# Altium PCB LM3488_PCB1.PcbDoc
Units mm, origin at the board's own origin, x right, y up, seen from the top; angles counter-clockwise.
Board outline 70.99 x 22.48 mm, 2 copper layers (Top Layer, Bottom Layer); 20 components, 12 nets, 53 pads, 98 vias.
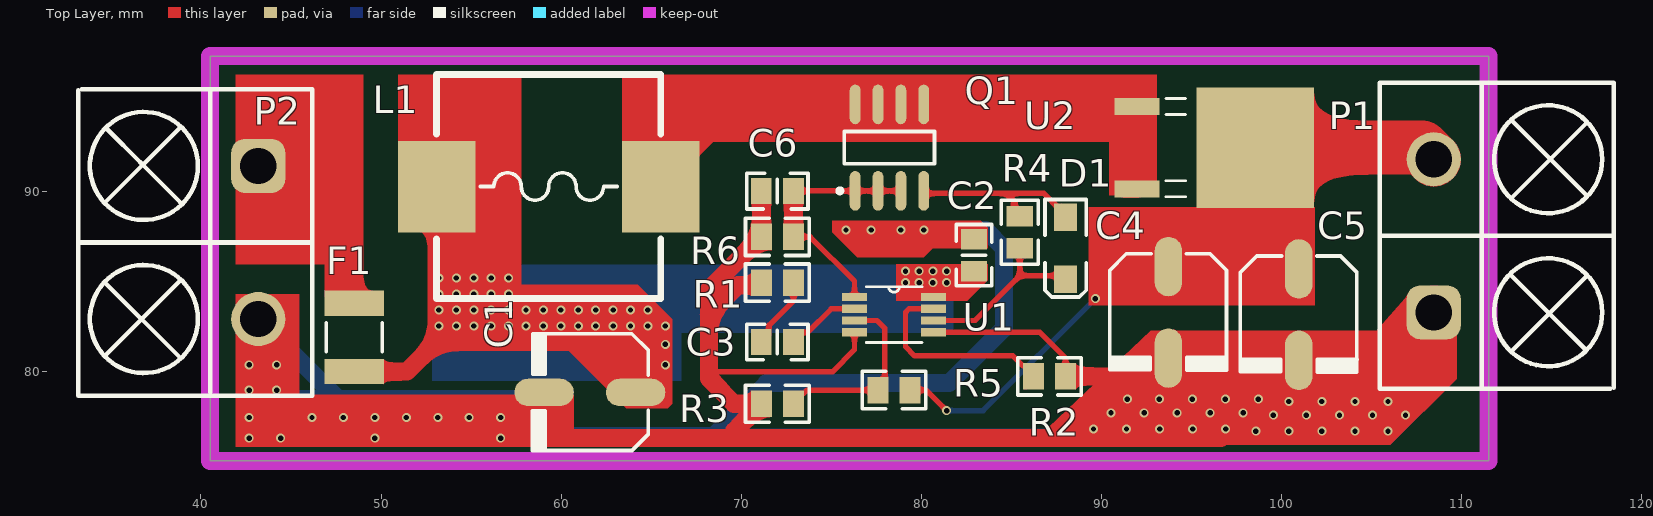
[diagram p0: Top Layer view]
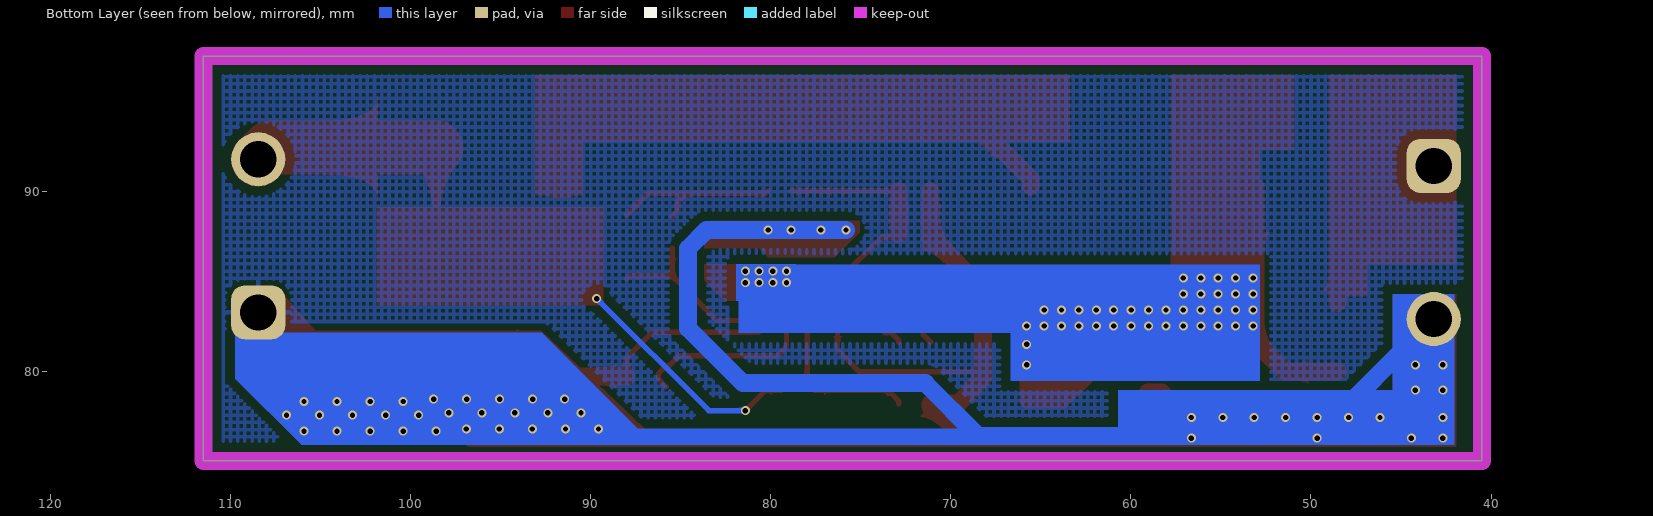
[diagram p1: Bottom Layer view, seen from below]
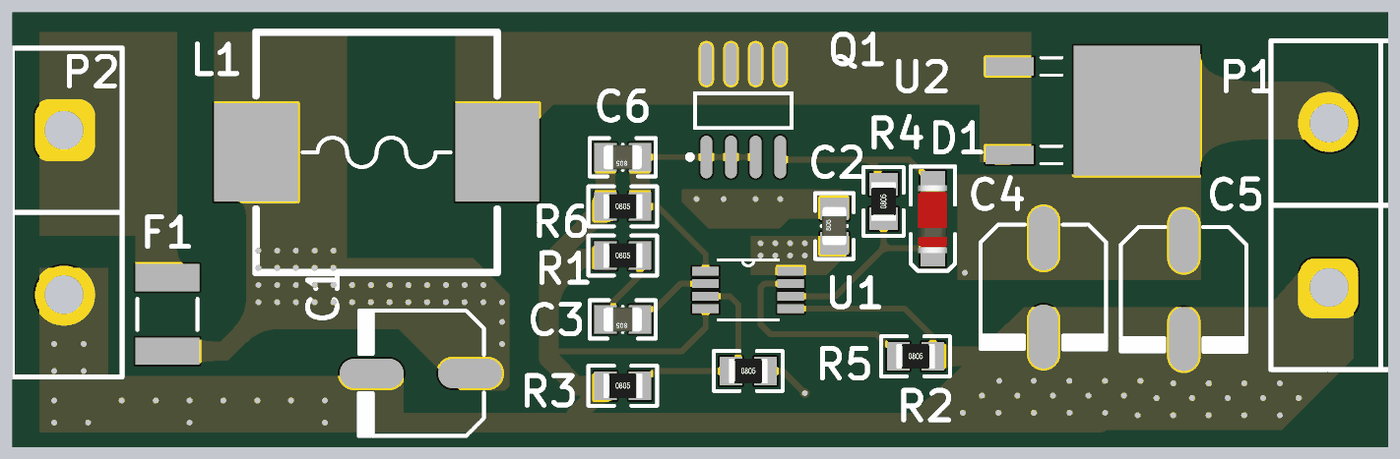
[diagram p2: 3D render of the assembled board from above, using the file's embedded part models]

## Layer stack, top to bottom
Top Solder: solder mask 0.0102, Solder Resist, Dk 3.5
Top Layer: signal copper 0.0356
Dielectric 1: dielectric 0.32, FR-4, Dk 4.8
Bottom Layer: signal copper 0.0356
Bottom Solder: solder mask 0.0102, Solder Resist, Dk 3.5

## Board outline
40.513,75.057 40.513,97.536 111.506,97.536 111.506,75.057

## Design rules (kind name [scope] priority, off if disabled: settings)
Clearance [All] p1: gap=0.1 ignorepadtopadclearanceinfootprint=FALSE
PolygonConnect [All] p1: connectstyle=Relief reliefconductorwidth=0.254 reliefentries=4 polygonreliefangle="90 Angle" airgapwidth=0.254
RoutingVias [All] p1: holewidth=0.711 width=1.27 viastyle="Through Hole" minholewidth=0.3 minwidth=0.5 maxholewidth=3 maxwidth=5
SolderMaskExpansion [All] p1: expansion=0.102
Width [All] p1: maxlimit=3 minlimit=0.254 preferedwidth=0.5
30 further rules are at their usual default settings.

## Components (designator, comment, footprint, x,y, rotation, side; value= is the part's Value field where it differs from the comment)
C1 "220μF" RB-220T 61.595,78.867 r180 top
C2 "Cap" 0805 82.931,86.487 r90 top value=100nF
C3 "Cap" 0805 72.009,81.661 r180 top value=22nF
C4 "220μF,16V,Ф6.3×7.7mm" RB-220T 93.726,83.312 r270 top value=220μF,16V,Ф6.3
C5 "220μF,16V,Ф6.3×7.7mm" RB-220T 100.965,83.185 r270 top value=220μF,16V,Ф6.3
C6 "Cap" 0805 72.009,90.043 r180 top value=1nF
D1 "DIODE1" SOD-1005A 88.011,86.868 r270 top value=1N4148
F1 "SMD200" 1812 48.514,81.92 r270 top
L1 "INDUCTOR1" L-12X12S 59.309,90.297 r0 top locked value=10UH
P1 "Header 2" 8.5端子 108.458,83.312 r90 top
P2 "Header 2" 8.5端子 43.18,91.44 r270 top
Q1 "IRF7807" SO-8_N 78.232,92.456 r90 top
R1 "4.7KΩ" 0805_R 72.009,84.963 r0 top
R2 "40KΩ" 0805_R 87.122,79.756 r0 top
R3 "22KΩ" 0805_R 72.009,78.232 r0 top
R4 "22Ω" 0805_R 85.471,87.757 r90 top
R5 "60KΩ" 0805_R 78.486,78.994 r0 top
R6 "0.025Ω" 0805_R 72.009,87.503 r0 top
U1 "LM3488" LM3488 78.486,83.185 r0 top
U2 "MBRD340" TO252 98.552,92.456 r270 top

## Footprints (in the part's own frame and the unit in brackets; to place one, negate y for a bottom-side part, rotate by r counter-clockwise, add the part's x,y. Pads: shape width x height; smd on the part's side, far side on the other; paste and mask are expansions set on the pad)
8.5端子 [mm]
  rrect50% 3x3 hole 2: 1(0,0)
  round 3 hole 2: 2(8.5,0)
  silkscreen extent -4.25,-10 12.75,3
0805 [mm]
  rect 1.15x1.45 smd: 1(-0.889,0) 2(0.889,0)
  silkscreen extent -1.7,-0.99 1.7,0.99, body extent -1,-0.63 1,0.63, height 0.78
0805_R [mm]
  rect 1.16x1.47 smd: 1(-0.89,0) 2(0.89,0)
  silkscreen extent -1.77,-1.04 1.77,1.03, body extent -1,-0.62 1,0.63, height 0.49
1812 [mm] "Chip Capacitor, Body 4.5x3.2mm, IPC High Density"
  rect 1.4x3.3 smd: 1(-1.9,0) 2(1.9,0)
  silkscreen extent -0.8,-1.55 0.8,1.55, body extent -2.4,-1.7 2.4,1.7, height 1.4
L-12X12S [mil]
  rect 170x200 smd: 1(-245,0) 2(245,0)
  Top Layer pour cut-out: -245.5,-245 -245.5,247 245.5,247 245.5,-245
  silkscreen extent -245,-245 245,245
LM3488 [mil]
  rect 54x18 smd mask+4: 1(-86.5,38.39) 2(-86.5,12.8) 3(-86.5,-12.8) 4(-86.5,-38.39) 5(86.5,-38.39) 6(86.5,-12.8) 7(86.5,12.8) 8(86.5,38.39)
  silkscreen extent -61,-61 61,61
RB-220T [mil]
  oval 130x60 smd: 1(-100,0) 2(100,0)
  silkscreen extent -128,-128 126,127
SO-8_N [mm] "SOIC, 8-Leads, Body 4.9x3.9mm, Pitch 1.27mm, IPC Medium Density"
  oval 2.2x0.6 smd: 1(-2.4,1.905) 2(-2.4,0.635) 3(-2.4,-0.635) 4(-2.4,-1.905) 5(2.4,-1.905) 6(2.4,-0.635) 7(2.4,0.635) 8(2.4,1.905)
  silkscreen extent -2.52,-2.5 0.9,2.88, body extent -2,-2.5 2,2.5, height 1.75
SOD-1005A [mil]
  rect 60x50 smd: 1(-67.5,0) 2(67.5,0)
  silkscreen extent -107,-45 106,45, body extent -68,-30 70,30, height 59
TO252 [mil] "二极管之类的封装"
  rect 37x98 smd: 1(-90,-258.5) 3(90,-258.5)
  rect 264x257 smd: 4(0,0)
  silkscreen extent -107,-196 108,-152

## Part data
C1 C4 C5: "Electrolytic Capacitor", ComponentLink1Description=ErpDataInfo, ComponentLink1URL=http://192.168.0.2:8012/ErpExt/ErpData/ListMateriel.aspx?pkey=1.02.06.0002, RoHS=RoHS
  C1: 规格型号=470¦
C2 C3 C6: "Capacitor", LatestRevisionDate=17-Jul-2002, LatestRevisionNote="Re-released for DXP Platform.", PackageDescription="Radial Cap, Thru-Hole; 2 Leads; 0.3 in Pin Spacing", PackageReference=RAD-0.3, Published=8-Jun-2000, Publisher="Altium Limited"
D1: "单向导通二极管", ComponentLink1Description=ErpDataInfo, ComponentLink1URL=http://erp.zlgmcu.com/ErpExt/ErpData/ListMateriel.aspx?pkey=1.04.07.0002, RoHS=RoHS, 封装=L, 规格型号=1N414
F1: "Fuse", ComponentLink1Description=ErpDataInfo, ComponentLink1URL=http://erp.zlgmcu.com/ErpExt/ErpData/ListMateriel.aspx?pkey=1.06.03.0003, RoHS=RoHS, 规格型号=SMD2
P1 P2: "Header, 2-Pin", LatestRevisionDate=17-Jul-2002, LatestRevisionNote="Re-released for DXP Platform.", Publisher="Altium Limited"
Q1: "HEXFET Power MOSFET", Code_IPC=SOIC127P600-8, Code_JEDEC=MS-012-AA, ComponentLink1Description="Manufacturer Link", ComponentLink1URL=http://www.irf.com/, ComponentLink2Description=Datasheet, ComponentLink2URL=http://www.irf.com/product-info/datasheets/data/irf7807.pdf, DatasheetVersion=10-Oct-2000, LatestRevisionDate=13-Apr-2006, LatestRevisionNote="IPC-7351 Footprint Added.", PackageDescription="8-Pin Plastic Small Outline Integrated Circuit 1.27 mm Pitch", PackageReference=SO-8, PackageVersion=Feb-2001, Published=17-Sep-2003, Publisher="Altium Limited"
R1 R2 R3 R4 R5 R6: library part "0805 1.5KΩ (1501) 1%", "贴片电阻", Package=0805, SuppliersPartNumber=C4310, ComponentLink1Description=供?, ComponentLink1URL=http://www.szlcsc.com/product/details_4717.html, Supplier=LC
U2: "大功率二极管"
L1: ComponentLink1Description=ErpDataInfo, ComponentLink1URL=http://192.168.0.2:8012/ErpExt/ErpData/ListMateriel.aspx?pkey=1.03.01.0049

## Via types
v1: diameter 0.5, hole 0.3, Top Layer to Bottom Layer, tented both sides, 98 vias

## Nets (pads, with @x,y where several pads share a name; then routed paths per layer and width w, separated by ;. In a path a pad name is that pad's centre, name@x,y a point inside that pad or via, vN(x,y) a via of type N, cw(c..) or ccw(c..) an arc to the next point about the centre after c; other vN are vias at no path point)
+5V/2A: C4.1 C5.1 P1.2 R5.2 U2.4 | length 43.6
  Top Layer w0.3: R5.2 80.264,78.994 v1(81.407,77.851) ; v1(89.662,84.074) 91.44,85.852 C4.1 93.853,85.725 C5.1 100.965,86.161 100.4,86.727 99.963,86.727 98.552,88.138 U2.4
  Top Layer w3: U2.4 107.814,92.456 P1.2
  Bottom Layer w0.3: v1(81.407,77.851) 83.439,77.851 v1(89.662,84.074)
GND: C1.2 C2.2 C4.2 C5.2 C6.2 P1.1 P2.2 R1.1 R2.2 R3.1 R6.1 U1.4 U1.5 | length 177.6
  Top Layer w0.3: 68.199,79.629 68.58,80.01 75.057,80.01 76.289,81.242 U1.4 ; U1.5 86.573,82.21 88.012,80.771 R2.2
  Top Layer w1: 45.593,76.454 50.673,76.454 ; v1(56.642,76.327) 96.647,76.327 96.887,76.567 ; 56.642,76.581 56.769,76.581 58.066,77.878 58.066,78.625 58.308,78.867 C1.2 ; 69.595,76.708 70.884,77.997 71.039,77.997 71.119,78.077 R3.1 69.596,78.232 68.199,79.629 68.199,83.185 ; R1.1 71.119,84.896 71.039,84.816 69.83,84.816 68.199,83.185 ; C6.2 R6.1 R6.1 71.119,87.348 71.039,87.268 70.884,87.268 68.199,84.583 68.199,83.185 ; R2.2 93.457,79.756 93.726,80.025 C4.2 ; 93.218,76.454 97.409,80.645
  Top Layer w3: C4.2 93.853,80.645 97.409,80.645 C5.2 105.791,80.645 P1.1
  Bottom Layer w1: P2.2 49.666,76.454 68.495,76.454 71.416,79.375 81.534,79.375 84.582,82.423 84.582,86.868 83.566,87.884 v1(75.819,87.884)
  other v1: 42.672,76.327 44.418,76.327 49.657,76.327 98.58,76.708 100.415,76.708 102.249,76.708 104.084,76.708 105.918,76.708 89.563,76.835 91.398,76.835 93.232,76.835 95.067,76.835 96.901,76.835 42.672,77.47 46.164,77.47 47.911,77.47 49.657,77.47 51.403,77.47 53.149,77.47 54.896,77.47 56.642,77.47 99.554,77.597 101.388,77.597 103.223,77.597 105.057,77.597 106.892,77.597 90.537,77.724 92.371,77.724 94.206,77.724 96.04,77.724 97.875,77.724 100.415,78.359 102.249,78.359 104.084,78.359 105.918,78.359 91.44,78.486 93.218,78.486 95.052,78.486 96.887,78.486 98.721,78.486 42.672,78.994 44.196,78.994 42.672,80.391 44.196,80.391 77.216,87.884 78.867,87.884 80.137,87.884
NetC3_1: C3.1 U1.2 | length 4.2
  Top Layer w0.3: C3.1 72.898,81.777 73.323,82.202 73.693,82.202 75.001,83.51 U1.2
NetC3_2: C3.2 R1.2 | length 4
  Top Layer w0.3: C3.2 71.534,82.075 71.534,82.583 72.899,83.948 R1.2
NetC6_1: C6.1 Q1.1 Q1.2 Q1.3 R6.2 U1.1 | length 13.8
  Top Layer w0.3: C6.1 72.911,90.056 Q1.1 Q1.2 Q1.3 ; R6.2 73.824,87.503 76.289,85.039 U1.1
  Top Layer w0.5: R6.2 R6.2@72.899,87.658
  Top Layer w1: C6.1 C6.1 R6.2@72.899,87.658
NetD1_1: D1.1 Q1.4 R4.2 | length 10.6
  Top Layer w0.3: Q1.4 Q1.4 80.276,89.916 84.709,89.916 ; R4.2 R4.2@85.217,88.901 ; D1.1@88.011,88.709 86.804,89.916 84.709,89.916 ; 84.709,89.916 85.124,89.501 85.124,89.408 ; 85.124,89.408 85.217,89.408 R4.2@85.217,88.901 ; 85.124,89.408 85.124,88.994 R4.2@85.217,88.901
NetD1_2: D1.2 R4.1 U1.6 | length 10
  Top Layer w0.3: U1.6 82.987,82.86 85.471,85.344 ; R4.1 85.471,85.344 ; D1.2 87.82,85.344 85.471,85.344
NetF1_1: F1.1 P2.1 | length 11.2
  Top Layer w1: P2.1 43.308,91.312 45.594,91.312 48.514,88.392 F1.1
NetL1_2: L1.2 Q1.5 Q1.6 Q1.7 Q1.8 U2.1 U2.3 | length 34.4
  Top Layer w1: L1.2 65.532,90.678 67.191,92.337 67.318,92.337 67.752,92.771 70.104,95.123 90.107,95.123 90.488,94.742 ; U2.3 91.272,90.17 91.242,90.2 91.242,93.989 90.488,94.742 ; U2.1 90.488,94.742
NetR2_1: R2.1 U1.7 | length 12.2
  Top Layer w0.3: U1.7 79.319,83.51 79.121,83.312 79.121,81.407 79.629,80.899 85.089,80.899 85.647,80.341 85.802,80.341 86.232,79.911 R2.1 86.232,79.601 R2.1@85.802,79.171
NetR3_2: R3.2 R5.1 U1.3 | length 10.6
  Top Layer w0.3: R3.2 72.899,78.387 73.329,78.817 73.484,78.817 73.661,78.994 R5.1 77.978,79.376 77.978,82.423 77.541,82.86 U1.3
VCC: C1.1 C2.1 F1.2 L1.1 U1.8 | length 29.8
  Top Layer w0.3: U1.8 80.754,84.23 81.563,84.23 82.356,85.023 82.356,85.173 82.781,85.598 C2.1
  Top Layer w1: F1.2 51.445,80.02 53.086,81.661 ; L1.1 53.086,81.661 ; C1.1 63.905,78.867 63.663,79.109 63.663,80.482 62.484,81.661 53.086,81.661
  other v1: 65.786,80.391 65.786,81.534 53.213,82.55 54.18,82.55 55.147,82.55 56.114,82.55 57.082,82.55 58.049,82.55 59.016,82.55 59.983,82.55 60.95,82.55 61.917,82.55 62.885,82.55 63.852,82.55 64.819,82.55 65.786,82.55 53.213,83.439 54.18,83.439 55.147,83.439 56.114,83.439 57.082,83.439 58.049,83.439 59.016,83.439 59.983,83.439 60.95,83.439 61.917,83.439 62.885,83.439 63.852,83.439 64.819,83.439 53.213,84.328 54.18,84.328 55.147,84.328 56.114,84.328 57.082,84.328 79.121,84.963 79.883,84.963 80.645,84.963 81.407,84.963 53.213,85.217 54.18,85.217 55.147,85.217 56.114,85.217 57.082,85.217 79.121,85.598 79.883,85.598 80.645,85.598 81.407,85.598

## Polygon pours and split planes (outlines as drawn)
no net on Bottom Solder "Top Layer-No Net" (hatched 90Degree grid 0.4 track 0.203, remove dead copper): 41.91,92.837
no net on Top Layer "Top Layer-No Net" (hatched 90Degree grid 0.4 track 0.203, remove dead copper, pour order 0): 40.64,97.79
GND on Bottom Layer "Top Layer-No Net" (hatched 90Degree grid 0.4 track 0.203, remove dead copper, pour order 2): 40.513,75.057 111.252,75.057 111.506,75.311 111.506,97.536 40.513,97.536

## Keep-outs
Keep-Out Layer:
  the board outline again, w1

## Other copper
Top Layer:
  rectangle net NetL1_2: 63.373,92.771 93.091,96.52
  rectangle net GND: 41.91,75.819 60.706,78.74
  rectangle net GND: 41.91,75.946 45.466,84.328
  rectangle net NetL1_2: 90.424,89.789 93.091,93.091
  rectangle net VCC: 50.927,92.329 57.785,96.52
  rectangle net +5V/2A: 89.281,83.693 101.854,89.154
  rectangle net VCC: 78.613,83.947 81.28,85.979
  rectangle net NetF1_1: 46.863,84.201 48.26,86.36
  rectangle net NetF1_1: 41.91,85.979 49.022,96.52
  rectangle net VCC: 52.832,82.042 57.785,92.837
  region net GND: 86.046,75.946 106.045,75.946 109.728,79.629 109.728,83.185 108.585,84.328 107.696,84.328 105.664,82.296 92.73,82.296
  region net GND: 83.693,86.868 80.645,86.868 80.137,86.36 76.454,86.36 75.057,87.757 75.057,88.392 83.312,88.392 83.693,88.011
  region: 83.693,86.868
  region net VCC: 83.693,85.979 83.693,85.09 82.55,83.947 78.613,83.947 78.613,85.979
  region net VCC: 57.531,84.836 64.262,84.836 66.167,82.931 66.167,78.232 65.913,77.978 63.627,77.978 60.071,81.534 57.912,81.534 57.531,81.915
Bottom Layer:
  rectangle net GND: 44.196,75.946 60.706,78.994
  rectangle net GND: 42.037,75.946 45.466,84.328
  rectangle net VCC: 66.421,82.169 81.788,85.979
  rectangle net VCC: 52.832,79.502 66.675,85.979
  region net GND: 60.198,75.946 106.045,75.946 109.728,79.629 109.728,82.169 92.71,82.169 87.376,76.835 68.58,76.835
  region net GND: 67.31,76.073
  region net VCC: 78.613,85.979 78.613,83.947 81.915,83.947 81.915,84.709 81.915,85.979

## Text inside footprints (layer, text, board x,y; h text height)
C2: Mechanical 15 "1" at 83.381,86.323 h0.91 r90
C3: Mechanical 15 "1" at 72.173,82.111 h0.91 r180
C6: Mechanical 15 "1" at 72.173,90.493 h0.91 r180